# EAGLE board Simulation V1 (EAGLE 9.7.0)

Size 356.35 x 188.57 mm. Coordinates in mm from the lower left corner, seen from the top.
Outline: 0,0 356.35,0 356.35,188.57 0,188.57 0,0
Copper layers (1*16): Top 0.035mm / dielectric 1.5mm / Bottom 0.035mm
Design rules "default": minimum track width 6mil, minimum drill 0.35mm, track to track 6mil, track to pad 6mil, pad to pad 6mil, via to via 6mil, smd to smd 6mil, copper to edge 40mil, drill to drill 6mil, minimum pad ring 10mil, minimum via ring 8mil, stop-mask expansion 4mil, vias tented up to drill 0mil, thermal gap 10mil

## Footprints (pad centres in the part's own frame; a part is rotated, then mirrored left to right if it is on the bottom)
BATTERY-GENERIC = drill 1.118 pad 3.15 octagon: + 2.54,0; - -2.54,0
HC-SR04 = drill 1.016 long: 1 -3.81,0; 2 -1.27,0; 3 1.27,0; 4 3.81,0
DG01D = drill 1.118 pad 3.15 octagon: + 2.54,0; - -2.54,0
TO220BV = drill 1.016 long: D 0,-2.54; G -2.54,-2.54; S 2.54,-2.54
ARDUINO-UNO-R3-SHIELD = drill 1.016 pad 1.88: 3.3V 24.13,-2.54; 5V 24.13,0; A0 24.13,12.7; A1 24.13,15.24; A2 24.13,17.78; A3 24.13,20.32; A4 24.13,22.86; A5 24.13,25.4; AREF -24.13,-13.97; D2 -24.13,20.32; D3 -24.13,17.78; D4 -24.13,15.24; D5 -24.13,12.7; D6 -24.13,10.16; D7 -24.13,7.62; D8 -24.13,3.81; D9 -24.13,1.27; D10 -24.13,-1.27; D11 -24.13,-3.81; D12 -24.13,-6.35; D13 -24.13,-8.89; GND@0 24.13,2.54; GND@1 24.13,5.08; GND@2 -24.13,-11.43; IOREF 24.13,-7.62; NC 24.13,-10.16; RES 24.13,-5.08; RX -24.13,25.4; SCL -24.13,-19.05; SDA -24.13,-16.51; TX -24.13,22.86; VIN 24.13,7.62
TSOP48 = drill 0.8: 1 -2.54,0; 2 0,0; 3 2.54,0

## Placement (x,y rotation side)
BAT1  6V  [BATTERY-GENERIC]  267.86,8.26 90 top
DIST1  DISTANCE-SENSOR-4PINHC-SR04  [HC-SR04]  135.87,126.45 0 top
DIST2  DISTANCE-SENSOR-4PINHC-SR04  [HC-SR04]  211.37,126.59 0 top
M1  MOTOR_DG01D  [DG01D]  283.27,132.37 270 top
M2  MOTOR_DG01D  [DG01D]  348.73,132.45 270 top
T1  NMOSFET  [TO220BV]  233.68,84.63 0 top
T2  NMOSFET  [TO220BV]  210.82,84.63 0 top
U1  ARDUINO-UNO-R3-SHIELD  [ARDUINO-UNO-R3-SHIELD]  47.88,158.72 270 top
ULEFT  IR-RECEIVERTSOP48  [TSOP48]  111.76,64.31 0 top
URIGHT  IR-RECEIVERTSOP48  [TSOP48]  124.46,64.31 0 top

## Library data of the parts
BAT1 DIST1 DIST2 M1 M2 U1 ULEFT URIGHT = Tinkercad
T1 T2 = Tinkercad; CATEGORY: Transistor; SUB-CATEGORY: MOSFET; TYPE: N-Channel

## Nets
BAT1+: BAT1.+ M1.+ M2.+
M1_-: M1.- T1.D
M2_-: M2.- T2.D
U1_5V: DIST1.1 DIST2.1 U1.5V
U1_D2: DIST1.2 U1.D2
U1_D3: DIST1.3 U1.D3
U1_D4: DIST2.2 U1.D4
U1_D5: DIST2.3 U1.D5
U1_D6: T1.G U1.D6
U1_D7: T2.G U1.D7
U1_GND: DIST1.4 DIST2.4 T1.S T2.S U1.GND@0 U1.GND@1 U1.GND@2

## Tracks (layer width: path | path; a pad name or v marks a point on that pad's centre or on a via)
BAT1+  (2 unrouted)
M1_-  (1 unrouted)
M2_-  (1 unrouted)
U1_5V  (2 unrouted)
U1_D2  (1 unrouted)
U1_D3  (1 unrouted)
U1_D4  (1 unrouted)
U1_D5  (1 unrouted)
U1_D6  (1 unrouted)
U1_D7  (1 unrouted)
U1_GND  (6 unrouted)